# EAGLE board dc_q84 v1 (EAGLE 9.7.0), part 1 of 2
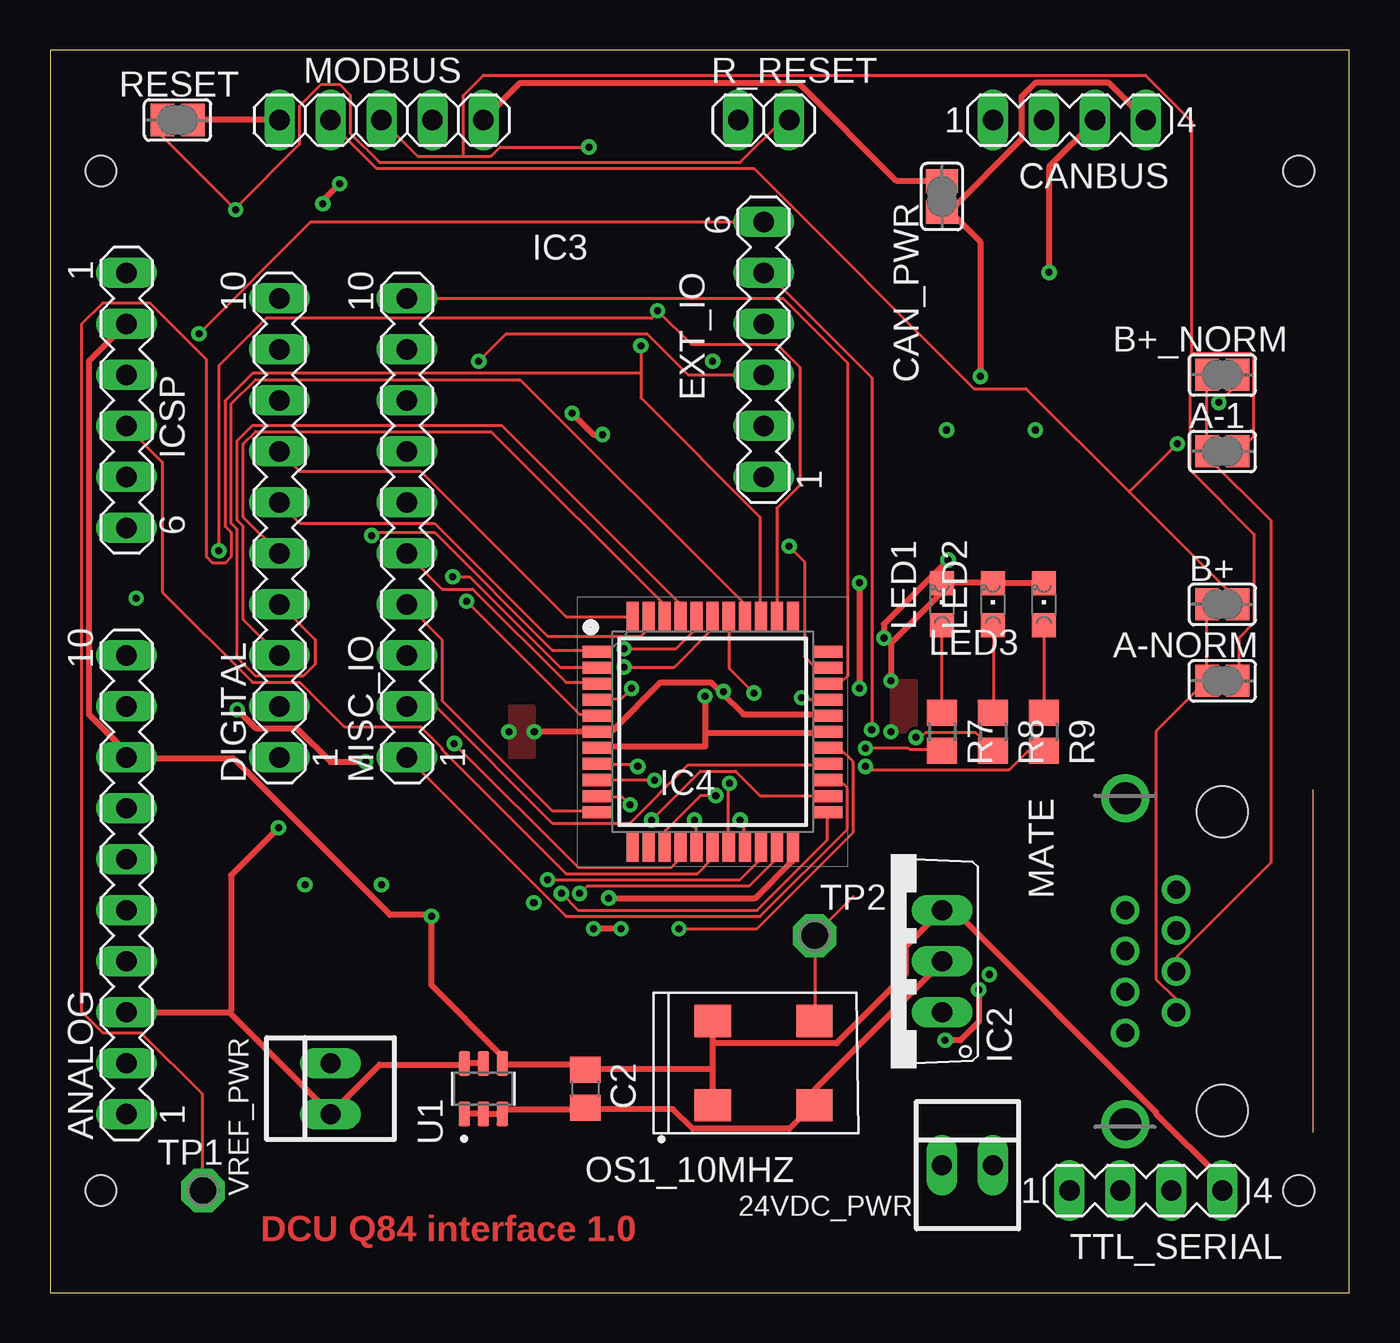
[diagram p0: board, top side]
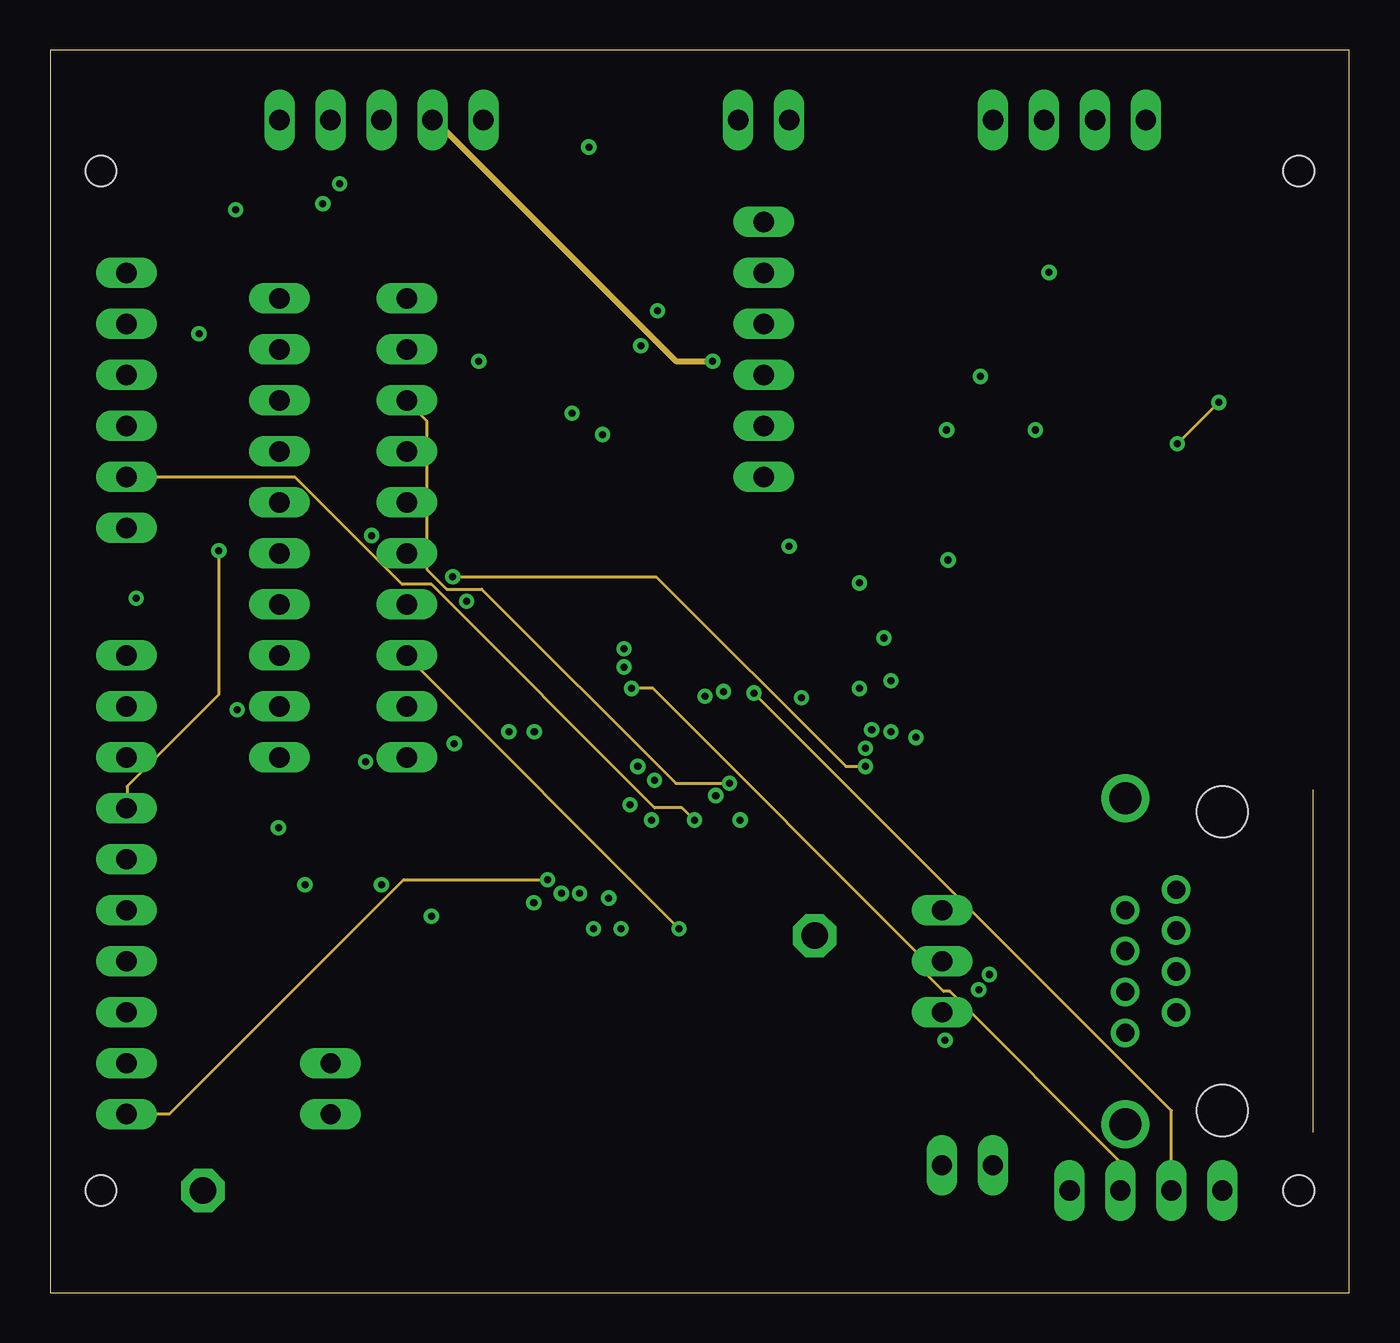
[diagram p1: board, inner layer Route2]
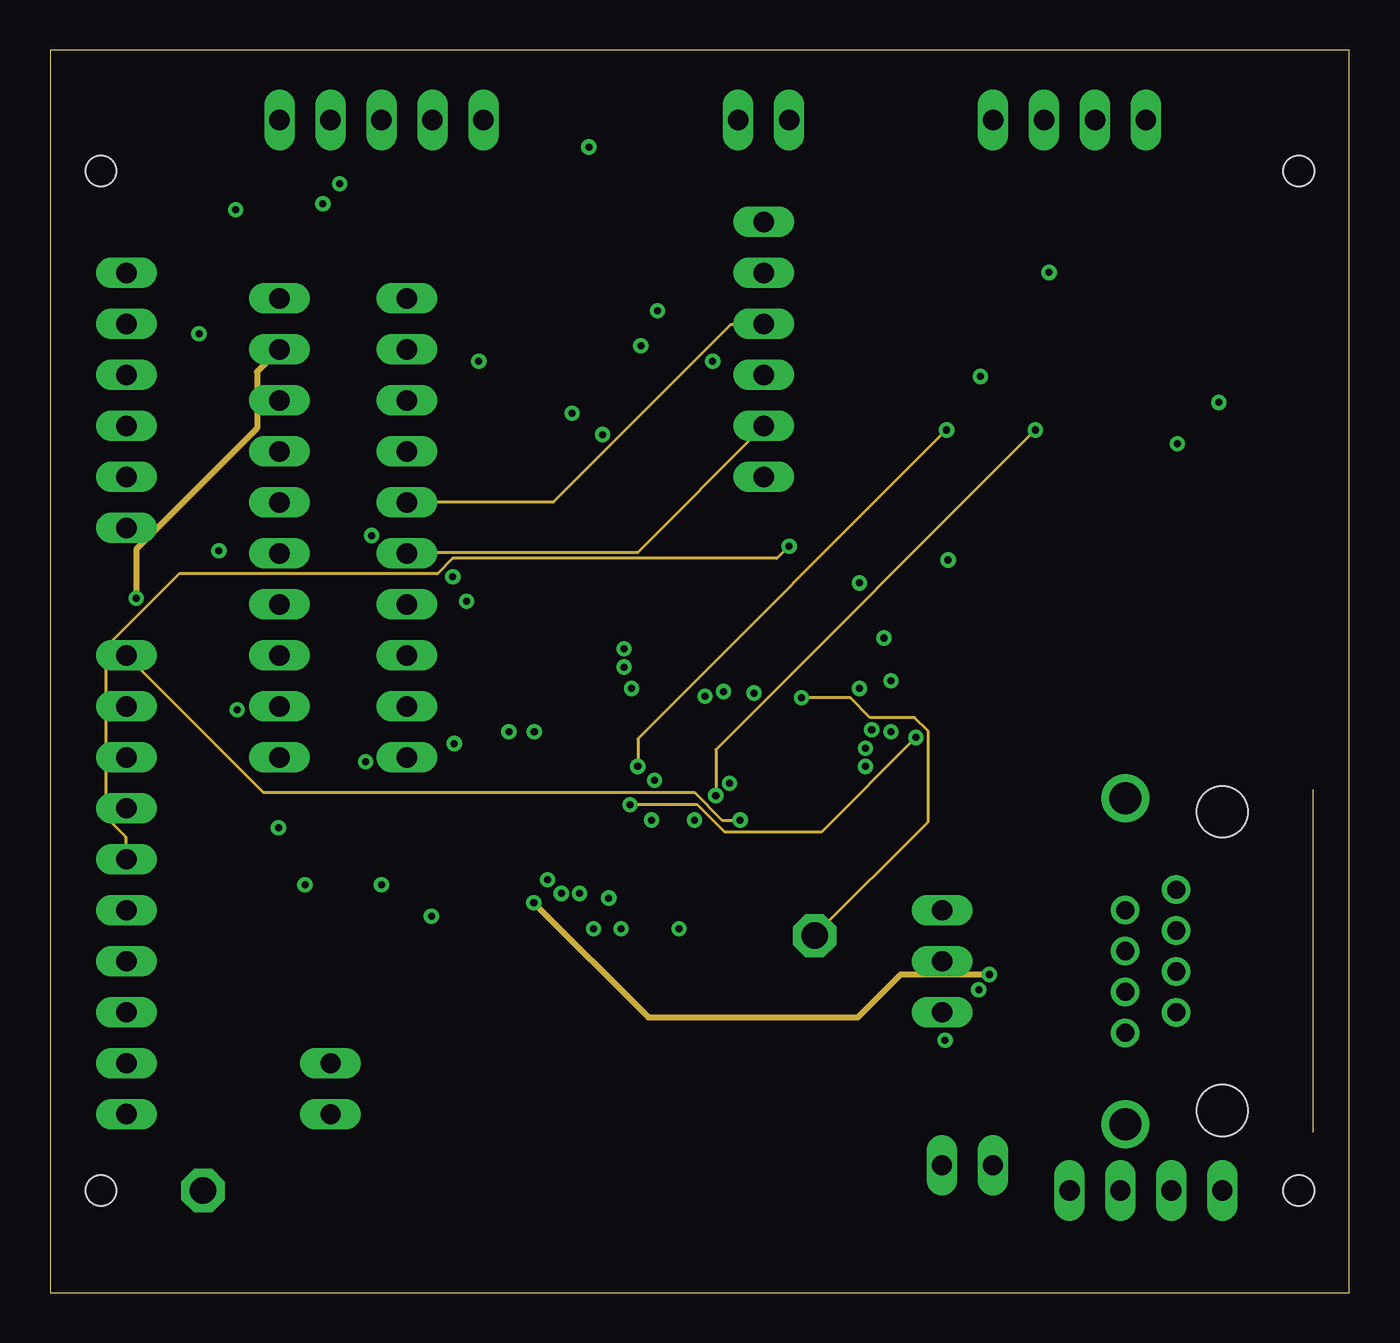
[diagram p2: board, inner layer Route15]
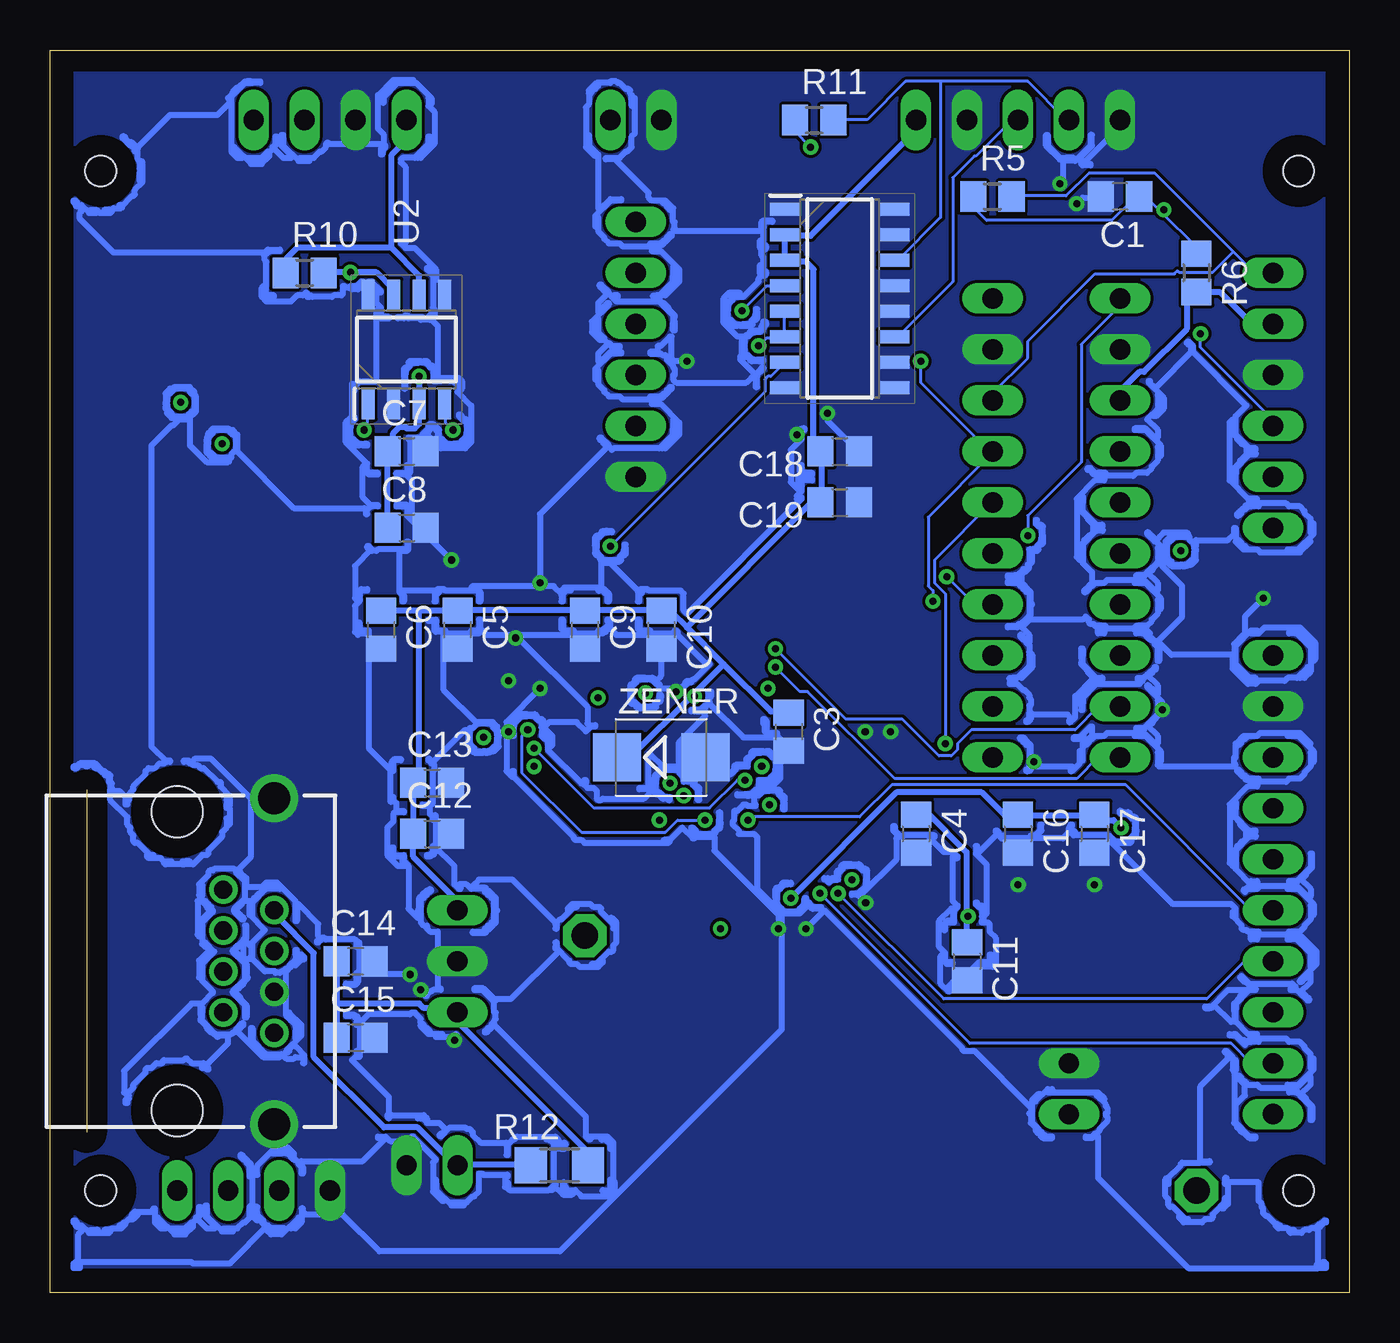
[diagram p3: board, bottom side, seen from below]

Size 64.75 x 61.9 mm. Coordinates in mm from the lower left corner, seen from the top.
Outline: 0,0 64.75,0 64.75,61.9 0,61.9 0,0
Copper layers (1+2*15+16): Top 0.035mm / dielectric 1.5mm / Route2 0.035mm / dielectric 0.15mm / Route15 0.035mm / dielectric 0.2mm / Bottom 0.035mm
Design rules "Fusion Electronics Design Rules": minimum track width 6mil, minimum drill 0.35mm, track to track 6mil, track to pad 6mil, pad to pad 6mil, via to via 6mil, smd to smd 6mil, copper to edge 40mil, drill to drill 6mil, minimum pad ring 10mil, minimum via ring 8mil, stop-mask expansion 4mil, vias tented up to drill 0mil, thermal gap 10mil
Net classes: 1 icurrent: width 0.305 mm
Holes 1.52 mm at 2.54,55.88 62.23,55.88 2.54,5.08 62.23,5.08
vRestrict: area 29.2,26.7 to 36.8,29.2

## Footprints (pad centres in the part's own frame; a part is rotated, then mirrored left to right if it is on the bottom)
22-23-2021 = drill 1 long: 1 -1.27,0; 2 1.27,0
SJ = smd 1.168 x 1.6: 1 -0.762,0; 2 0.762,0
MA10-1 = drill 1.016 long: 1 -11.43,0; 2 -8.89,0; 3 -6.35,0; 4 -3.81,0; 5 -1.27,0; 6 1.27,0; 7 3.81,0; 8 6.35,0; 9 8.89,0; 10 11.43,0
C0805 = smd 1.3 x 1.5: 1 -0.95,0; 2 0.95,0
MA04-1 = drill 1.016 long: 1 -3.81,0; 2 -1.27,0; 3 1.27,0; 4 3.81,0
MA06-1 = drill 1.016 long: 1 -6.35,0; 2 -3.81,0; 3 -1.27,0; 4 1.27,0; 5 3.81,0; 6 6.35,0
TO220V = drill 1.016 long: 1 -2.54,-2.54; 2 0,-2.54; 3 2.54,-2.54
SOIC127P600X175-16N = smd 1.525 x 0.65: 1 -2.712,4.445; 2 -2.712,3.175; 3 -2.712,1.905; 4 -2.712,0.635; 5 -2.712,-0.635; 6 -2.712,-1.905; 7 -2.712,-3.175; 8 -2.712,-4.445; 9 2.712,-4.445; 10 2.712,-3.175; 11 2.712,-1.905; 12 2.712,-0.635; 13 2.712,0.635; 14 2.712,1.905; 15 2.712,3.175; 16 2.712,4.445
QFP80P1200X1200X120-44N = smd 1.475 x 0.6: 1 -5.738,4; 2 -5.738,3.2; 3 -5.738,2.4; 4 -5.738,1.6; 5 -5.738,0.8; 6 -5.738,0; 7 -5.738,-0.8; 8 -5.738,-1.6; 9 -5.738,-2.4; 10 -5.738,-3.2; 11 -5.738,-4; 23 5.738,-4; 24 5.738,-3.2; 25 5.738,-2.4; 26 5.738,-1.6; 27 5.738,-0.8; 28 5.738,0; 29 5.738,0.8; 30 5.738,1.6; 31 5.738,2.4; 32 5.738,3.2; 33 5.738,4 | smd 0.6 x 1.475: 12 -4,-5.738; 13 -3.2,-5.738; 14 -2.4,-5.738; 15 -1.6,-5.738; 16 -0.8,-5.738; 17 0,-5.738; 18 0.8,-5.738; 19 1.6,-5.738; 20 2.4,-5.738; 21 3.2,-5.738; 22 4,-5.738; 34 4,5.738; 35 3.2,5.738; 36 2.4,5.738; 37 1.6,5.738; 38 0.8,5.738; 39 0,5.738; 40 -0.8,5.738; 41 -1.6,5.738; 42 -2.4,5.738; 43 -3.2,5.738; 44 -4,5.738
CHIPLED_0805 = smd 1.2 x 1.2: A 0,-1.05; C 0,1.05
GLX-S-88M = drill 0.9 pad 1.422: 1 -3.57,-2.3; 2 -2.55,-4.84; 3 -1.53,-2.3; 4 -0.51,-4.84; 5 0.51,-2.3; 6 1.53,-4.84; 7 2.55,-2.3; 8 3.57,-4.84 | drill 1.6 pad 2.184: S1 -8.125,-4.84; S2 8.125,-4.84 | hole 2.55: -7.44,0; 7.44,0
1X05 = drill 1.016 long: 1 -5.08,0; 2 -2.54,0; 3 0,0; 4 2.54,0; 5 5.08,0
7.2X5.2-4-PAD = smd 1.8 x 1.6: 1 -2.54,-2.1; 2 2.54,-2.1; 3 2.54,2.1; 4 -2.54,2.1
R0805 = smd 1.3 x 1.5: 1 -0.95,0; 2 0.95,0
R1206 = smd 1.6 x 1.803: 1 -1.422,0; 2 1.422,0
1X02 = drill 1.016 long: 1 -1.27,0; 2 1.27,0
P1-13 = drill 1.321 pad 2.159 octagon: TP 0,0
SOT95P280X145-6N = smd 1.21 x 0.58: 1 -1.255,0.95; 2 -1.255,0; 3 -1.255,-0.95; 4 1.255,-0.95; 5 1.255,0; 6 1.255,0.95
SOIC127P600X175-8N = smd 1.528 x 0.65: 1 -2.711,1.905; 2 -2.711,0.635; 3 -2.711,-0.635; 4 -2.711,-1.905; 5 2.711,-1.905; 6 2.711,-0.635; 7 2.711,0.635; 8 2.711,1.905
SMB = smd 2.4 x 2.4: A 2.2,0; C -2.2,0

## Placement (x,y rotation side)
24VDC_PWR  24vdc power  [22-23-2021]  45.72,6.35 0 top
A-1  A-  [SJ]  58.42,41.91 0 top
A-NORM  A-norm  [SJ]  58.42,30.48 0 top
ANALOG  Analog  [MA10-1]  3.81,20.32 90 top
B+  B+  [SJ]  58.42,34.29 0 top
B+_NORM  B+norm  [SJ]  58.42,45.72 0 top
C1  0.1uf  [C0805]  11.43,54.61 180 bottom
C2  0.1uf  [C0805]  26.67,10.16 270 top
C3  0.1uf  [C0805]  27.94,27.94 270 bottom
C4  10uf  [C0805]  21.59,22.86 270 bottom
C5  0.1uf  [C0805]  44.45,33.02 270 bottom
C6  10uf  [C0805]  48.26,33.02 270 bottom
C7  0.1uf  [C0805]  46.99,41.91 0 bottom
C8  10uf  [C0805]  46.99,38.1 0 bottom
C9  0.1uf  [C0805]  38.1,33.02 270 bottom
C10  10uf  [C0805]  34.29,33.02 270 bottom
C11  0.1uf  [C0805]  19.05,16.51 270 bottom
C12  0.1uf  [C0805]  45.72,22.86 0 bottom
C13  10uf  [C0805]  45.72,25.4 0 bottom
C14  0.1uf  [C0805]  49.53,16.51 0 bottom
C15  10uf  [C0805]  49.53,12.7 0 bottom
C16  0.1uf  [C0805]  16.51,22.86 270 bottom
C17  10uf  [C0805]  12.7,22.86 270 bottom
C18  0.1uf  [C0805]  25.4,41.91 0 bottom
C19  10uf  [C0805]  25.4,39.37 0 bottom
CAN_PWR  CAN_PWR  [SJ]  44.45,54.61 90 top
CANBUS  CANBUS  [MA04-1]  50.8,58.42 0 top
DIGITAL  Digtal  [MA10-1]  11.43,38.1 90 top
EXT_IO  EXT_IO  [MA06-1]  35.56,46.99 90 top
IC2  7805TV  [TO220V]  41.91,16.51 90 top
IC3  ADM3095EBRZ  [SOIC127P600X175-16N]  25.4,49.53 0 bottom
IC4  PIC18F47Q84-I_PT  [QFP80P1200X1200X120-44N]  33.02,27.94 0 top
ICSP  ICSP  [MA06-1]  3.81,44.45 270 top
LED1  run  [CHIPLED_0805]  44.45,34.29 0 top
LED2  error  [CHIPLED_0805]  46.99,34.29 0 top
LED3  comm  [CHIPLED_0805]  49.53,34.29 0 top
MATE  GLX-S-88M  [GLX-S-88M]  58.42,16.51 270 top
MISC_IO  misc-io  [MA10-1]  17.78,38.1 90 top
MODBUS  MODBUS  [1X05]  16.51,58.42 0 top
OS1_10MHZ  OSC-OE-CFPS-72  [7.2X5.2-4-PAD]  35.56,11.43 0 top
R5  56ohm  [R0805]  17.78,54.61 0 bottom
R6  10k  [R0805]  7.62,50.8 270 bottom
R7  1k  [R0805]  44.45,27.94 270 top
R8  1k  [R0805]  46.99,27.94 270 top
R9  1k  [R0805]  49.53,27.94 270 top
R10  120ohm  [R0805]  52.07,50.8 0 bottom
R11  120  [R0805]  26.67,58.42 0 bottom
R12  0 ohm fuse  [R1206]  39.37,6.35 180 bottom
R_RESET  remote_reset  [1X02]  35.56,58.42 0 top
RESET  reset  [SJ]  6.35,58.42 0 top
TP1  PTR1PAD1-13  [P1-13]  7.62,5.08 0 top
TP2  PTR1PAD1-13  [P1-13]  38.1,17.78 0 top
TTL_SERIAL  TTL Serial  [MA04-1]  54.61,5.08 0 top
U1  REF3440IDBVR  [SOT95P280X145-6N]  21.59,10.16 90 top
U2  TCAN330GDR  [SOIC127P600X175-8N]  46.99,46.99 90 bottom
VREF_PWR  5vdc_vref_pwr  [22-23-2021]  13.97,10.16 90 top
ZENER  5.6V  [SMB]  34.29,26.67 0 bottom

## Library data of the parts
24VDC_PWR VREF_PWR = con-molex; MF: MOLEX; MPN: 22-23-2021; OC_FARNELL: 1462926; OC_NEWARK: 25C3832
A-1 A-NORM B+ B+_NORM CAN_PWR RESET = jumper
ANALOG CANBUS DIGITAL EXT_IO ICSP MISC_IO TTL_SERIAL = con-lstb; OC_FARNELL: unknown; OC_NEWARK: unknown
C1-C19 = rcl; SPICEPREFIX: C
IC2 = linear
IC3 = ADM3095EBRZ; DESCRIPTION: Level 4 EMC Protected RS-485 Transceiver with Full +/-42 V Fault Protection; HEIGHT: 1.75mm; MANUFACTURER_NAME: Analog Devices; MANUFACTURER_PART_NUMBER: ADM3095EBRZ; MOUSER_PART_NUMBER: 584-ADM3095EBRZ; MOUSER_PRICE-STOCK: https://www.mouser.com/Search/Refine.aspx?Keyword=584-ADM3095EBRZ
IC4 = PIC18F47Q84-I_PT; DESCRIPTION: 8-bit Microcontrollers - MCU CAN-FD, 128KB Flash, 13KB RAM, 12b ADC3, UTMR, DAC, Comp, PWM, CCP, CWG, HLT, WWDT, SCAN/CRC, ZCD, PPS,Comms IDLE/DOZE/PMD, JTAG; HEIGHT: 1.2mm; MANUFACTURER_NAME: Microchip; MANUFACTURER_PART_NUMBER: PIC18F47Q84-I/PT; MOUSER_PART_NUMBER: 579-PIC18F47Q84-I/PT; MOUSER_PRICE-STOCK: https://www.mouser.co.uk/ProductDetail/Microchip-Technology/PIC18F47Q84-I-PT?qs=d0WKAl%252BL4KYthTnAmf%2FYSg%3D%3D
LED1-LED3 = led
MATE = con-kycon; OC_FARNELL: unknown; OC_NEWARK: unknown
MODBUS R_RESET = pinhead
OS1_10MHZ = IQD-Frequency-Products
R5-R12 = rcl; SPICEPREFIX: R
TP1 TP2 = testpad
U1 = REF3440IDBVR; AVAILABILITY: In Stock; DESCRIPTION: 4.1-V, low-drift, low-power, small-footprint series voltage reference; MF: Texas Instruments; MP: REF3440IDBVR; PACKAGE: SOT-23-6 Texas Instruments; PRICE: None; PURCHASE-URL: https://pricing.snapeda.com/search/part/REF3440IDBVR/?ref=eda
U2 = TCAN330GDR; DESCRIPTION: 3.3-V CAN Transceivers with CAN FD (Flexible Data Rate); HEIGHT: 1.75mm; MANUFACTURER_NAME: Texas Instruments; MANUFACTURER_PART_NUMBER: TCAN330GDR; MOUSER_PART_NUMBER: 595-TCAN330GDR; MOUSER_PRICE-STOCK: https://www.mouser.co.uk/ProductDetail/Texas-Instruments/TCAN330GDR?qs=9DwIlvx97adeWwzxdqwSPw%3D%3D
ZENER = diode

## Nets
AN0: ANALOG.10 IC4.19
AN1: ANALOG.1 IC4.20
AN2: ANALOG.2 IC4.21
AN4: ANALOG.4 IC4.23
AN5: ANALOG.5 IC4.24
CAN_N [icurrent]: CANBUS.1 R10.1 U2.6
CAN_P [icurrent]: CANBUS.3 R10.2 U2.7
CAN_VCC [icurrent]: C7.1 C8.1 CAN_PWR.1 CANBUS.4 U2.3
CANRX: IC4.8 U2.4
CANTX: IC4.14 U2.1
CLOCKO: IC4.31 MISC_IO.10
CPU_CLK: IC4.30 OS1_10MHZ.3 TP2.TP
CS: DIGITAL.3 IC4.41
DB0: DIGITAL.1 IC4.39
DB1: DIGITAL.2 IC4.40
DERE: IC3.5 IC3.6 IC4.36 TP1.TP
DLED: IC4.2 IC4.11 MISC_IO.4 R9.2
MB_A: A-1.2 A-NORM.2 IC3.11 MODBUS.3 R11.1
MB_B: B+.2 B+_NORM.2 IC3.14 MODBUS.2 R11.2
MB_RX: ANALOG.6 IC3.7 IC4.32
MB_TX: ANALOG.7 IC3.4 IC4.35
MCLR_SIG: IC4.18 ICSP.1 MISC_IO.8 R5.2
MISC: IC4.26 MISC_IO.2
MLED: IC4.9 R7.2
N$1: A-NORM.1 B+.1 MATE.7
N$2 [icurrent]: C14.1 C15.1 IC2.1 R12.1
N$3: A-1.1 B+_NORM.1 MATE.5
N$4: LED1.A R7.1
N$5: LED2.A R8.1
N$6: LED3.A R9.1
PC_RX2: IC4.38 TTL_SERIAL.3
PC_TX2: IC4.4 TTL_SERIAL.2
PGC: EXT_IO.5 IC4.16 ICSP.5
PGD: EXT_IO.6 IC4.17 ICSP.4
R_RESET: C1.1 R5.1 R6.1 R_RESET.2 RESET.1
RB5: EXT_IO.4 IC4.15 MISC_IO.6
RD5: EXT_IO.2 IC4.3 MISC_IO.5
RD7: EXT_IO.3 IC4.5 MISC_IO.7
RE2: IC4.27 MISC_IO.3
RELAY: IC4.25 MISC_IO.1
RLED: IC4.10 R8.2
SCK1: DIGITAL.4 IC4.37
SDI1: DIGITAL.5 IC4.42
SDO1: DIGITAL.6 IC4.43
UC_RX: DIGITAL.10 IC4.1
UC_TX: DIGITAL.7 IC4.44
V+ [icurrent]: 24VDC_PWR.1 MATE.2 R12.2
VDD [icurrent]: ANALOG.8 C2.1 C3.1 C4.1 C5.1 C6.1 C9.1 C10.1 C11.1 C12.1 C13.1 C18.1 C19.1 CAN_PWR.2 DIGITAL.8 IC2.3 IC3.2 IC3.3 IC4.7 IC4.28 ICSP.2 MODBUS.5 OS1_10MHZ.1 OS1_10MHZ.4 R6.2 TTL_SERIAL.4 U1.4 ZENER.C
VREF [icurrent]: ANALOG.3 C16.1 C17.1 IC4.22 U1.5 U1.6 VREF_PWR.1
VSS [icurrent]: 24VDC_PWR.2 ANALOG.9 C1.2 C2.2 C3.2 C4.2 C5.2 C6.2 C7.2 C8.2 C9.2 C10.2 C11.2 C12.2 C13.2 C14.2 C15.2 C16.2 C17.2 C18.2 C19.2 CANBUS.2 DIGITAL.9 EXT_IO.1 IC2.2 IC3.1 IC3.8 IC3.9 IC3.10 IC3.12 IC3.13 IC3.15 IC3.16 IC4.6 IC4.29 ICSP.3 LED1.C LED2.C LED3.C MATE.6 MATE.S1 MATE.S2 MISC_IO.9 MODBUS.1 MODBUS.4 OS1_10MHZ.2 R_RESET.1 RESET.2 TTL_SERIAL.1 U1.1 U1.2 U1.3 U2.2 U2.5 U2.8 VREF_PWR.2 ZENER.A

## Tracks (layer width: path | path; a pad name or v marks a point on that pad's centre or on a via)
AN0  (via drill 0.35)
  Top 0.152: v34.39,23.55 34.54,23.39 34.54,22.25 IC4.19
  Route15 0.152: v34.39,23.55 33.48,23.55 32.11,24.92 10.62,24.92 3.84,31.7 ANALOG.10
AN1  (via drill 0.35)
  Top 0.152: v24.79,20.57 34.39,20.57 35.38,21.56 35.38,22.17 IC4.20
  Route2 0.152: v24.79,20.57 17.63,20.57 5.97,8.92 3.84,8.92 ANALOG.1
AN2  (via drill 0.35)
  Top 0.152: v26.39,19.89 26.77,20.27 34.85,20.27 36.14,21.56 36.14,22.17 IC4.21
  Bottom 0.152: v26.39,19.89 18.92,12.42 5.89,12.42 4.9,11.43 ANALOG.2
AN4  (via drill 0.35)
  Top 0.152: v25.48,19.89 26.31,19.05 35.23,19.05 38.73,22.55 38.73,23.93 IC4.23
  Bottom 0.152: v25.48,19.89 20.22,14.63 7.11,14.63 5.28,16.46 3.84,16.46 ANALOG.4
AN5  (via drill 0.35)
  Top 0.152: v29.97,23.55 32.41,25.98 34.16,25.98 35.38,24.77 38.73,24.77 IC4.24
  Bottom 0.152: v29.97,23.55 29.82,23.7 24.41,23.7 22.81,25.3 11.15,25.3 4.9,19.05 ANALOG.5
CAN_N
  Bottom 0.305: 47.73,52.04 52.45,52.04 52.98,51.51 52.98,50.82 R10.1 | 47.73,52.04 46.36,50.67 U2.6 | 47.73,52.04 47.73,56.69 47.04,57.38 47.04,58.37 CANBUS.1
CAN_P  (via drill 0.35)
  Top 0.305: v49.78,50.82 49.78,56.08 52.07,58.37 CANBUS.3
  Bottom 0.305: R10.2 51.08,50.82 v49.78,50.82 48.49,50.82 47.65,49.99 47.65,49.76 U2.7
CAN_VCC  (via drill 0.35)
  Top 0.305: CANBUS.4 52.76,60.27 49.1,60.27 48.41,59.59 48.41,57.45 44.83,53.87 44.45,53.87 CAN_PWR.1 44.91,53.8 46.36,52.35 v46.36,45.64
  Bottom 0.305: C8.1 47.95,38.1 47.95,41.91 C7.1 47.8,41.99 47.65,42.14 47.65,42.82 47.35,43.13 47.04,43.13 46.97,43.05 46.58,43.05 46.36,43.28 U2.3 v46.36,45.64
CANRX  (via drill 0.35)
  Top 0.152: v29.29,26.21 29.21,26.29 27.31,26.29 IC4.8
  Route15 0.152: v29.29,26.21 29.29,27.58 v44.68,42.98
  Bottom 0.152: v44.68,42.98 45.06,43.36 45.06,44.27 U2.4
CANTX  (via drill 0.35)
  Top 0.152: v33.17,24.77 32.41,24.77 30.66,23.01 30.66,22.25 IC4.14
  Route15 0.152: v33.17,24.77 33.17,27.05 v49.1,42.98
  Bottom 0.152: v49.1,42.98 49.1,43.2 48.95,43.36 48.95,44.27 U2.1
CLOCKO
  Top 0.152: MISC_IO.10 36.53,49.53 39.73,46.33 39.73,30.71 39.42,30.4 38.81,30.4 IC4.31
CPU_CLK  (via drill 0.35)
  Top 0.152: 39.42,29.49 38.81,29.49 IC4.30 38.73,29.57 37.52,29.57 v37.44,29.64 | 40.03,19.74 38.12,17.83 TP2.TP 38.12,17.75 38.12,13.56 OS1_10MHZ.3
  Route15 0.152: v37.44,29.64 39.88,29.64 40.87,28.65 43.08,28.65 43.76,27.96 43.76,23.47 38.12,17.83 TP2.TP
CS
  Top 0.152: IC4.41 31.42,34.29 22.5,43.2 10.08,43.2 9.32,42.44 9.32,38.48 9.63,38.18 9.63,33.53 11.38,31.77 DIGITAL.3
DB0  (via drill 0.35)
  Top 0.152: IC4.39 33.02,33.07 31.12,31.17 v28.6,31.17
  Bottom 0.152: v28.6,31.17 27.38,29.95 27,29.95 22.66,25.6 13.59,25.6 12.52,26.67 DIGITAL.1
DB1  (via drill 0.35)
  Top 0.152: v28.6,32.08 31.19,32.08 32.18,33.07 32.18,33.6 IC4.40
  Bottom 0.152: v28.6,32.08 25.09,28.57 22.28,28.57 20.45,26.75 19.84,26.75 19.53,27.05 19.53,27.36 18.85,28.04 13.67,28.04 12.52,29.18 11.45,29.18 DIGITAL.2
DERE  (via drill 0.35)
  Top 0.152: v29.44,47.17 29.44,45.8 | 29.44,45.8 29.44,44.58 35.38,38.63 35.38,33.68 IC4.36 | 29.44,45.8 10.08,45.8 8.71,44.42 8.71,38.18 9.02,37.87 9.02,36.65 8.71,36.35 8.1,36.35 7.8,36.65 7.8,46.48 4.98,49.3 2.62,49.3 1.55,48.23 1.55,14.02 2.62,12.95 4.52,12.95 7.57,9.91 7.57,5.1 TP1.TP
  Bottom 0.152: v29.44,47.17 29.06,47.55 28.22,47.55 28.14,47.62 | 28.14,47.62 28.14,48.84 IC3.5 | 28.14,47.62 IC3.6
DLED  (via drill 0.35)
  Top 0.152: MISC_IO.4 19.53,32.54 19.53,29.49 25.02,24 27.23,24 IC4.11 | v20.07,35.66 20.9,35.66 25.4,31.17 27.23,31.17 IC4.2 | v40.64,26.21 40.79,26.06 47.8,26.06 48.72,26.98 49.48,26.98 R9.2
  Route2 0.152: v40.64,26.21 39.65,26.21 30.2,35.66 v20.07,35.66
  Bottom 0.152: v20.07,35.66 18.69,34.29 MISC_IO.4
MB_A  (via drill 0.35)
  Top 0.152: 56.91,46.75 56.95,46.79 59.84,46.79 60,46.63 60,42.67 59.23,41.91 A-1.2 | 56.91,46.75 56.79,46.63 56.79,41 60,37.79 60,33.38 59.23,32.61 59.23,30.48 A-NORM.2 | v26.85,57.07 22.43,57.07 21.97,56.62 20.6,56.62 | 20.6,56.62 18.31,56.62 MODBUS.3 | 20.6,56.62 20.6,59.66 21.59,60.65 54.59,60.65 56.87,58.37 56.87,46.79 56.91,46.75
  Bottom 0.152: v26.85,57.07 27.61,57.84 27.61,58.37 R11.1 | IC3.11 22.5,47.62 19.76,50.37 19.76,55.55 18.69,56.62 18.62,56.62 16.87,58.37 16.56,58.37 MODBUS.3
MB_B  (via drill 0.35)
  Top 0.152: 53.78,39.89 48.64,45.03 46.05,45.03 35.08,56.01 16.26,56.01 13.97,58.29 MODBUS.2 | 53.78,39.89 59.16,34.52 59.16,34.29 B+.2 | v58.24,44.35 59.16,45.26 59.16,45.72 B+_NORM.2 | 53.78,39.89 v56.19,42.29
  Route2 0.152: v56.19,42.29 v58.24,44.35
  Bottom 0.152: 20.37,60.35 16.03,60.35 14.12,58.45 13.97,58.45 MODBUS.2 | 20.37,60.35 22.12,60.35 24.03,58.45 25.7,58.45 R11.2 | IC3.14 22.5,51.43 20.37,53.57 20.37,60.35
MB_RX  (via drill 0.35)
  Top 0.152: v36.83,37.19 37.59,36.42 37.59,31.7 38.12,31.17 38.73,31.17 IC4.32
  Route15 0.152: v36.83,37.19 36.22,36.58 20.07,36.58 19.3,35.81 6.43,35.81 2.77,32.16 2.77,23.7 3.76,22.71 3.76,21.64 ANALOG.6
  Bottom 0.152: v36.83,37.19 29.13,44.88 29.13,45.49 28.98,45.64 28.83,45.64 28.14,46.33 IC3.7
MB_TX  (via drill 0.35)
  Top 0.152: IC4.35 36.22,39.09 37.36,40.23 37.36,46.1 36.22,47.24 31.95,47.24 v30.28,48.92 30.28,48.84 29.97,48.54 10.77,48.54 8.41,46.18 v8.41,36.96
  Route2 0.152: v8.41,36.96 8.41,29.79 3.84,25.22 3.84,24.16 ANALOG.7
  Bottom 0.152: v30.28,48.92 29.06,50.14 28.14,50.14 IC3.4
MCLR_SIG  (via drill 0.35)
  Top 0.152: v33.86,25.38 33.78,25.3 33.78,22.25 IC4.18
  Route2 0.152: v33.86,25.38 31.19,25.38 21.51,35.05 19.76,35.05 18.77,36.04 18.77,43.43 17.78,44.42 MISC_IO.8
  Bottom 0.152: 5.78,51.85 4.75,50.82 3.84,50.82 ICSP.1 | 5.78,51.85 9.7,55.78 12.98,55.78 14.12,54.63 16.79,54.63 R5.2 | 5.78,51.85 6.81,50.82 8.48,50.82 8.56,50.9 8.71,50.75 12.67,50.75 16.03,47.4 16.03,46.56 17.78,44.81 MISC_IO.8
MISC
  Top 0.152: 38.73,26.29 IC4.26 38.66,26.29 31.8,26.29 28.91,23.39 25.02,23.39 19.23,29.18 17.78,29.18 MISC_IO.2
MLED  (via drill 0.35)
  Top 0.152: v30.12,25.53 27.31,25.53 IC4.9 | v40.64,27.13 42.77,27.13 42.85,27.05 44.45,27.05 R7.2
  Bottom 0.152: v30.12,25.53 30.51,25.53 31.88,24.16 37.67,24.16 v40.64,27.13
N$1
  Top 0.152: 57.63,30.48 57.63,34.29 B+.1 | 57.63,30.48 55.12,27.96 55.12,15.62 56.11,14.63 56.11,14.02 MATE.7 | 57.63,30.48 A-NORM.1
N$2
  Bottom 0.305: 50.47,14.4 50.47,16.46 C14.1 | 50.47,14.4 50.47,12.72 C15.1 | R12.1 37.97,6.4 37.97,7.01 44.45,13.49 IC2.1 44.53,14.1 44.6,14.17 46.13,14.17 46.36,14.4 50.47,14.4
N$3
  Top 0.152: B+_NORM.1 57.63,45.72 57.63,41.91 A-1.1 57.71,41.91 57.71,41.6 60.83,38.48 60.83,21.41 56.19,16.76 56.19,16 MATE.5
N$4
  Top 0.152: R7.1 LED1.A
N$5
  Top 0.152: LED2.A 47.04,33.22 47.04,28.96 R8.1
N$6
  Top 0.152: LED3.A 49.56,33.22 49.56,28.96 R9.1
PC_RX2  (via drill 0.35)
  Top 0.152: v35.08,29.87 33.86,31.09 33.86,33.6 IC4.38
  Route2 0.152: v35.08,29.87 55.88,9.07 TTL_SERIAL.3
PC_TX2  (via drill 0.35)
  Top 0.152: v28.98,30.1 28.45,29.57 27.31,29.57 IC4.4
  Route2 0.152: v28.98,30.1 30.05,30.1 43.46,16.69 43.46,16.08 44.53,15.01 44.83,15.01 53.29,6.55 53.29,5.1 TTL_SERIAL.2
PGC  (via drill 0.35)
  Top 0.152: v32.11,23.55 32.18,23.47 32.18,22.25 IC4.16 | v40.95,28.04 40.95,45.57 35.76,50.75 35.61,50.75 EXT_IO.5
  Route2 0.152: v32.11,23.55 31.5,24.16 30.12,24.16 19,35.28 17.55,35.28 12.22,40.61 3.84,40.61 ICSP.5
  Bottom 0.152: v32.11,23.55 33.48,23.55 34.09,22.94 38.28,22.94 41.25,25.91 41.25,27.74 v40.95,28.04
PGD  (via drill 0.35)
  Top 0.152: IC4.17 33.02,21.64 32.26,20.88 25.7,20.88 19.53,27.05 19.53,27.13 18.47,28.19 14.66,28.19 12.45,30.4 10.08,30.4 5.59,34.9 5.59,41.38 3.84,43.13 ICSP.4 | EXT_IO.6 12.98,53.34 v7.42,47.78
  Bottom 0.152: v7.42,47.78 7.42,47.09 3.84,43.51 3.84,43.2 ICSP.4
R_RESET  (via drill 0.35)
  Top 0.152: RESET.1 5.59,57.61 v9.25,53.95 9.25,54.03 12.45,57.23 12.45,59.13 13.51,60.2 14.43,60.2 14.96,59.66 14.96,57.76 16.41,56.31 34.39,56.31 36.45,58.37 36.83,58.37 R_RESET.2
  Bottom 0.152: 9.36,53.84 10.08,54.56 10.47,54.56 C1.1 10.54,54.56 10.69,54.56 11.84,53.42 18.09,53.42 18.69,54.03 18.69,54.56 R5.1 | 9.36,53.84 7.65,52.12 7.65,51.82 R6.1 | 9.36,53.84 v9.25,53.95
RB5  (via drill 0.35)
  Top 0.152: v20.14,27.36 26.31,21.18 30.96,21.18 31.42,21.64 31.42,22.17 IC4.15
  Route15 0.152: EXT_IO.4 35.53,48.23 33.93,48.23 25.09,39.39 17.78,39.39 MISC_IO.6
  Bottom 0.152: v20.14,27.36 20.14,34.82 20.68,35.36 20.68,36.5 17.78,39.39 MISC_IO.6
RD5
  Top 0.152: IC4.3 27.23,30.4 25.7,30.4 21.06,35.05 19.53,35.05 17.78,36.8 MISC_IO.5
  Route15 0.152: EXT_IO.2 35.53,43.13 29.29,36.88 17.78,36.88 MISC_IO.5
RD7  (via drill 0.35)
  Top 0.152: v20.75,34.44 26.39,28.8 27.23,28.8 IC4.5 | EXT_IO.3 31.8,45.72 29.74,47.78 22.73,47.78 v21.36,46.41
  Bottom 0.152: v20.75,34.44 20.75,34.98 20.98,35.2 20.98,38.63 17.78,41.83 MISC_IO.7 17.86,41.83 21.36,45.34 v21.36,46.41
RE2  (via drill 0.35)
  Top 0.152: v31.34,18.14 35.23,18.14 40.03,22.94 40.03,26.44 39.34,27.13 38.81,27.13 IC4.27
  Route2 0.152: v31.34,18.14 17.78,31.7 MISC_IO.3
RELAY
  Top 0.152: MISC_IO.1 25.7,18.74 35.38,18.74 39.73,23.09 39.73,25.15 39.34,25.53 38.81,25.53 IC4.25
RLED  (via drill 0.35)
  Top 0.152: v28.91,24.31 28.52,24.69 27.31,24.69 IC4.10 | v43.16,27.66 43.23,27.58 43.31,27.58 43.61,27.89 46.13,27.89 46.97,27.05 R8.2
  Route15 0.152: v28.91,24.31 32.26,24.31 33.63,22.94 38.43,22.94 v43.16,27.66
SCK1
  Top 0.152: IC4.37 34.54,33.68 34.54,34.37 23.42,45.49 10.24,45.49 9.02,44.27 9.02,38.33 9.32,38.02 9.32,31.62 10.24,30.71 12.6,30.71 13.21,31.32 13.21,32.54 11.45,34.29 DIGITAL.4
SDI1
  Top 0.152: DIGITAL.5 9.63,38.63 9.63,42.29 10.24,42.9 21.97,42.9 30.58,34.29 30.58,33.68 IC4.42
SDO1
  Top 0.152: IC4.43 29.82,33.6 29.82,33.07 29.44,32.69 24.79,32.69 19.15,38.33 12.45,38.33 11.45,39.32 DIGITAL.6
UC_RX  (via drill 0.35)
  Top 0.152: v16.03,37.72 16.18,37.87 19.15,37.87 25.02,32 27.23,32 IC4.1
  Bottom 0.152: v16.03,37.72 16.03,38.71 13.36,41.38 13.36,47.24 11.45,49.15 11.45,49.53 DIGITAL.10
UC_TX
  Top 0.152: IC4.44 28.98,33.68 25.7,33.68 18.47,40.92 12.45,40.92 11.45,41.91 DIGITAL.7
V+
  Bottom 0.305: R12.2 40.79,6.4 44.45,6.4 24VDC_PWR.1 44.53,6.33 46.43,8.23 48.11,8.23 51.61,11.74 51.61,16.92 53.52,18.82 53.52,19.05 MATE.2
VDD  (via drill 0.35)
  Top 0.305: CAN_PWR.2 44.45,55.4 42.16,55.4 37.29,60.27 23.42,60.27 21.59,58.45 MODBUS.5 | IC4.7 27.31,27.2 32.64,27.2 32.64,27.89 | IC4.28 38.73,27.89 32.64,27.89 | v32.64,29.72 32.64,27.89 | ICSP.2 3.76,48.23 1.93,46.41 1.93,28.8 3.76,26.98 3.76,26.67 ANALOG.8 3.91,26.59 9.17,26.59 16.94,18.82 18.92,18.82 v19,18.74 19,15.32 22.43,11.89 22.43,11.51 U1.4 22.58,11.35 26.39,11.35 26.62,11.12 C2.1 26.77,11.12 33.02,11.12 | OS1_10MHZ.4 33.02,12.42 | 33.02,12.42 33.02,11.12 | 33.02,11.12 OS1_10MHZ.1 | TTL_SERIAL.4 58.4,5.1 58.4,5.64 55.12,8.92 55.12,8.99 45.06,19.05 IC2.3 42.62,17.22 42.62,15.85 39.19,12.42 33.02,12.42
  Bottom 0.305: MODBUS.5 21.59,57.91 26.85,52.65 27.99,52.65 IC3.2 28.14,52.65 28.14,51.43 IC3.3 27.99,51.36 27.08,51.36 26.7,50.98 26.7,42.21 26.47,41.99 C18.1 26.31,41.91 26.31,39.39 C19.1 26.47,39.32 26.85,39.32 33.02,33.15 | 46.36,33.98 48.26,33.98 C6.1 | 46.36,33.98 44.45,33.98 C5.1 44.37,33.98 38.2,33.98 C9.1 38.05,33.98 34.39,33.98 C10.1 34.24,33.91 33.78,33.91 33.02,33.15 | 33.02,33.15 31.19,31.32 | 31.19,31.32 28.83,28.96 27.99,28.96 C3.1 | ZENER.C 35.84,26.67 32.72,29.79 | 31.19,31.32 32.72,29.79 | v32.64,29.72 32.72,29.79 | ICSP.2 3.84,48.31 4.9,48.31 6.43,49.84 7.57,49.84 R6.2 7.72,49.76 8.1,49.38 8.1,48.01 10.24,45.87 10.47,45.87 11.38,44.96 11.38,44.5 DIGITAL.8 | 19.08,18.74 19.08,21.95 20.98,23.85 21.59,23.85 C4.1 | 19.08,18.74 19.08,17.53 C11.1 | v19,18.74 19.08,18.74 | IC2.3 44.45,19.51 46.66,21.72 46.66,22.78 C12.1 46.66,25.38 C13.1 46.58,25.53 46.36,25.76 46.36,33.98
VREF  (via drill 0.35)
  Top 0.305: U1.5 21.59,11.43 20.68,11.43 U1.6 20.52,11.35 16.41,11.35 13.97,8.92 VREF_PWR.1 13.89,8.99 8.94,13.94 | 8.94,13.94 3.84,13.94 ANALOG.3 | v27.84,19.66 35.15,19.66 36.98,21.49 36.98,22.17 IC4.22 | v11.38,23.16 9.02,20.8 9.02,14.02 8.94,13.94
  Bottom 0.305: v27.84,19.66 22.58,24.92 18.31,24.92 17.17,23.77 16.56,23.77 C16.1 16.41,23.77 12.75,23.77 C17.1 12.6,23.7 12.45,23.55 11.76,23.55 v11.38,23.16
VSS  (via drill 0.35)
  Top 0.305: U1.1 20.68,8.92 21.59,8.92 U1.2 21.67,8.92 22.5,8.92 U1.3 22.66,8.99 22.81,9.14 26.62,9.14 C2.2 26.77,9.14 31.04,9.14 32.03,8.15 36.83,8.15 37.97,9.3 OS1_10MHZ.2 38.12,9.37 38.12,10.13 44.45,16.46 IC2.2 | LED3.C 49.48,35.36 47.12,35.36 LED2.C 46.97,35.36 44.45,35.36 LED1.C 44.37,35.2 44.37,34.82 41.94,32.38 41.94,30.48 v41.91,30.48 | v24.13,27.94 24.18,27.96 27.23,27.96 IC4.6 27.38,28.04 28.07,28.04 30.43,30.4 32.94,30.4 33.48,29.87 | 33.48,29.87 34.54,28.8 38.73,28.8 IC4.29 | RESET.2 7.11,58.45 11.38,58.45 MODBUS.1 | v33.55,29.95 33.48,29.87 | v44.6,12.57 45.36,12.57 46.28,13.49 v46.28,15.09 | v27.53,42.75 27.08,42.75 v26.01,43.81 | v41.55,32.61 41.55,33.3 v44.76,36.5 | v15.72,26.44 13.97,26.44 12.29,28.12 10.24,28.12 v9.32,29.03 | v28.45,18.14 v27.08,18.14 | v40.34,35.36 v40.34,30.1 | v13.59,54.25 13.59,54.41 v14.43,55.24
  Route2 0.305: v33.02,46.41 31.19,46.41 19.23,58.37 19.08,58.37 MODBUS.4
  Route15 0.305: v46.81,15.85 42.39,15.85 40.26,13.72 29.82,13.72 v24.11,19.43 | v4.29,34.59 4.29,37.03 10.31,43.05 10.31,45.87 DIGITAL.9
  Bottom 0.305: v33.55,29.95 33.4,29.79 33.33,29.87 33.33,30.02 32.87,30.48 32.79,30.48 | 32.79,30.48 32.79,30.4 32.87,30.4 32.94,30.48 33.02,30.48 33.1,30.4 33.1,30.33 33.33,30.1 34.39,30.1 34.39,30.33 34.54,30.33 34.85,30.63 35,30.63 35.08,30.56 35.53,30.56 35.53,30.4 35.84,30.1 35.84,29.95 35.76,29.87 35.76,29.41 35.61,29.41 35.31,29.11 35.15,29.11 35.08,29.18 34.62,29.18 34.62,29.34 34.31,29.64 34.31,29.79 34.39,29.79 34.39,29.64 34.31,29.57 34.31,29.49 34.39,29.41 34.47,29.41 34.54,29.34 34.54,29.18 34.62,29.11 35.08,29.11 35.15,29.18 35.31,29.18 35.38,29.11 35.46,29.11 35.53,29.18 35.53,29.26 35.61,29.34 35.76,29.34 35.84,29.41 35.84,29.87 35.76,29.95 35.76,30.1 35.84,30.17 35.84,30.25 35.76,30.33 35.69,30.33 35.61,30.4 35.61,30.56 35.53,30.63 35.08,30.63 35,30.56 34.85,30.56 34.77,30.63 34.7,30.63 34.62,30.56 34.62,30.48 34.54,30.48 34.31,30.71 34.31,32 C10.2 | 39.8,5.18 39.65,5.33 39.19,4.88 38.73,4.88 38.66,4.95 38.66,5.03 39.04,5.03 39.12,5.1 39.12,5.18 39.19,5.26 39.19,5.33 39.12,5.41 39.12,5.49 39.19,5.49 39.19,5.41 39.04,5.26 39.04,5.1 38.58,5.1 38.28,4.8 36.83,4.8 36.6,5.03 36.6,5.49 36.75,5.64 36.83,5.64 36.83,5.56 36.75,5.49 36.75,5.18 36.91,5.03 37.21,5.03 37.21,5.1 36.91,5.1 36.83,5.18 36.83,5.49 36.68,5.64 36.68,7.47 36.98,7.77 37.21,7.77 37.29,7.7 37.29,7.62 37.21,7.62 37.14,7.7 37.06,7.7 36.75,7.39 36.75,7.16 36.83,7.16 36.83,7.39 37.06,7.62 37.14,7.62 37.29,7.77 37.9,7.77 37.9,7.7 37.82,7.7 37.82,7.62 37.9,7.62 38.05,7.77 38.05,8.76 42.7,13.41 42.77,13.33 42.7,13.26 42.85,13.11 42.93,13.11 42.93,13.03 43,12.95 43.08,12.95 43.08,13.03 42.93,13.18 42.85,13.18 42.62,13.41 42.62,13.56 42.55,13.64 42.55,13.94 42.62,13.94 42.62,14.48 42.55,14.55 42.62,14.63 42.7,14.63 42.7,14.71 43.16,15.16 43.61,15.16 43.61,15.09 43.23,15.09 42.7,14.55 42.62,14.55 42.55,14.63 41.78,14.63 39.42,16.99 39.57,17.14 39.5,17.22 39.5,17.45 39.57,17.45 39.57,17.22 38.89,16.53 38.89,16.46 38.81,16.38 38.51,16.38 38.35,16.23 37.44,16.23 37.21,16.46 37.21,16.53 37.29,16.53 37.29,16.46 37.44,16.31 37.52,16.31 37.59,16.38 37.74,16.38 37.74,16.31 37.59,16.31 36.91,16.99 36.75,16.99 36.68,17.07 36.68,17.3 36.53,17.45 36.53,18.44 36.75,18.67 36.83,18.67 36.83,18.59 36.75,18.59 36.6,18.44 36.6,18.36 36.68,18.29 36.68,18.14 36.6,18.14 36.6,18.29 37.29,18.97 37.29,19.13 37.36,19.2 37.67,19.2 37.82,19.35 38.73,19.35 38.96,19.13 38.96,19.05 38.89,19.05 38.89,19.13 38.73,19.28 38.66,19.28 38.58,19.2 38.51,19.2 38.51,19.28 38.58,19.28 39.27,18.59 39.34,18.59 39.57,18.36 39.57,18.14 39.5,18.14 39.5,18.36 41.71,20.57 43.38,20.57 43.69,20.27 43.69,20.19 43.08,20.19 43,20.12 43.08,20.04 43.08,19.96 43,19.96 42.93,20.04 42.7,19.81 42.77,19.74 42.77,19.66 42.7,19.66 42.62,19.74 42.55,19.66 42.55,19.13 42.47,19.05 42.55,18.97 42.55,18.44 42.62,18.36 42.7,18.44 42.77,18.44 42.77,18.36 42.7,18.29 42.93,18.06 43,18.14 43.08,18.14 43.08,18.06 43,17.98 43.08,17.91 43.69,17.91 43.69,17.98 43.08,17.98 42.93,18.14 42.93,18.29 42.77,18.29 42.62,18.44 42.62,19.66 42.77,19.81 42.93,19.81 42.93,19.96 43.08,20.12 43.76,20.12 43.99,20.34 44.37,20.34 44.45,20.27 44.37,20.19 44.3,20.19 44.3,20.12 44.37,20.12 44.6,20.34 44.6,21.26 45.59,22.25 45.67,22.25 45.67,22.17 45.59,22.1 45.59,21.87 45.67,21.79 45.75,21.87 45.9,21.72 45.97,21.72 45.97,21.79 45.9,21.79 45.82,21.72 45.67,21.87 45.67,22.1 45.52,22.25 45.52,23.77 45.59,23.77 45.59,23.55 45.67,23.55 45.67,23.7 45.82,23.85 45.82,24.23 46.2,24.23 46.2,24.31 45.75,24.31 45.67,24.38 45.67,25.98 45.59,26.06 45.59,26.29 45.82,26.52 45.82,26.59 45.9,26.59 45.9,26.52 45.75,26.36 44.07,28.04 43.92,28.04 43.92,27.66 43.84,27.58 43.84,27.43 43.92,27.36 43.84,27.28 43.84,27.13 43.61,26.9 43.16,26.9 43.08,26.98 42.93,26.98 42.85,26.9 42.77,26.98 42.62,26.98 42.39,27.2 42.39,27.66 42.47,27.74 42.47,27.89 42.39,27.96 42.47,28.04 42.47,28.19 42.7,28.42 43.46,28.42 43.54,28.35 43.54,28.27 43.69,28.12 43.84,28.12 43.84,27.66 43.92,27.58 43.92,27.43 43.61,27.13 43.61,26.98 43.16,26.98 43.08,26.9 42.93,26.9 42.62,27.2 42.47,27.2 42.47,27.66 42.39,27.74 42.39,27.89 42.7,28.19 42.7,28.35 43.46,28.35 45.14,30.02 45.14,32.84 45.06,32.92 45.06,32.99 45.14,32.99 45.21,32.92 45.52,32.92 45.59,32.99 45.59,33.38 45.67,33.45 45.9,33.45 45.9,33.53 45.52,33.53 45.52,32.99 45.21,32.99 45.06,32.84 43.38,32.84 43.31,32.92 43.38,32.99 43.46,32.92 43.76,32.92 43.76,32.99 43.46,32.99 43.31,33.15 43.31,33.53 43.38,33.53 43.38,33.15 43,32.77 38.81,32.77 38.66,32.92 38.66,32.99 38.73,32.99 38.81,32.92 39.12,32.92 39.27,33.07 39.27,33.53 39.19,33.53 39.19,33.07 39.12,32.99 38.81,32.99 38.66,32.84 37.21,32.84 37.14,32.92 37.06,32.92 36.83,33.15 36.83,33.38 36.91,33.45 36.91,33.53 36.98,33.53 36.98,33.45 36.91,33.38 36.91,33.22 37.21,32.92 37.44,32.92 37.44,32.99 37.21,32.99 36.98,33.22 36.53,32.77 35,32.77 34.85,32.92 34.85,32.99 34.92,32.99 35,32.92 35.31,32.92 35.46,33.07 35.46,33.53 35.38,33.53 35.38,33.07 35.31,32.99 35,32.99 34.85,32.84 33.55,32.84 33.55,32.92 33.63,32.92 33.63,32.99 33.55,32.99 33.48,32.92 33.48,32.77 32.03,31.32 31.95,31.39 31.88,31.32 32.64,30.56 32.72,30.56 32.79,30.48
  Bottom 0.305: 39.8,5.18 39.8,5.1 39.73,5.1 39.65,5.18 39.65,5.26 39.57,5.33 39.57,5.49 39.65,5.56 39.65,7.54 39.8,7.54 39.95,7.7 40.03,7.7 40.03,7.62 39.95,7.62 39.88,7.7 39.8,7.7 39.73,7.62 39.65,7.62 39.57,7.54 39.57,7.16 39.27,7.16 39.04,7.39 39.12,7.47 39.19,7.39 39.19,7.31 39.12,7.24 39.12,7.16 39.19,7.16 39.42,7.39 39.42,7.62 39.57,7.77 41.48,7.77 41.63,7.62 41.71,7.62 41.94,7.39 41.94,6.86 42.01,6.86 42.01,7.47 43.31,7.47 43.69,7.85 43.69,8 43.84,8.15 43.99,8.15 44.07,8.23 44.83,8.23 45.29,7.77 45.36,7.85 45.29,7.92 45.21,7.92 45.06,8.08 45.06,8.15 45.36,8.46 45.97,8.46 46.28,8.76 46.43,8.76 46.43,8.69 46.28,8.69 46.2,8.76 46.13,8.76 46.05,8.69 46.05,8.61 45.97,8.61 45.97,8.69 46.13,8.84 47.73,8.84 47.88,8.69 47.95,8.76 47.95,8.84 47.88,8.84 47.88,9.75 49.71,11.58 49.48,11.81 49.48,12.04 49.4,12.04 49.4,11.74 49.33,11.74 49.33,13.33 49.48,13.49 49.48,13.72 49.63,13.87 49.78,13.87 49.86,13.79 50.01,13.79 50.01,13.94 49.94,13.94 49.94,13.87 49.86,13.87 49.78,13.79 49.63,13.79 49.56,13.72 49.48,13.79 49.4,13.72 49.4,13.49 49.48,13.41 49.48,13.33 49.4,13.33 48.87,13.87 46.81,13.87 46.74,13.94 46.58,13.94 46.28,13.64 46.28,13.41 46.05,13.18 45.97,13.18 45.82,13.03 45.82,12.95 45.9,12.95 45.97,13.03 45.97,13.11 46.05,13.11 46.2,13.26 46.13,13.33 46.2,13.41 46.28,13.33 46.28,13.26 45.9,12.88 45.21,12.88 45.21,12.8 45.52,12.8 45.52,12.72 44.68,12.72 44.53,12.88 44.45,12.8 44.45,12.72 v44.6,12.57 | v46.28,15.09 46.28,14.86 46.13,14.86 46.05,14.78 45.97,14.78 45.97,14.86 45.82,15.01 45.75,15.01 45.67,15.09 45.29,15.09 45.29,15.16 45.44,15.16 45.44,17.98 45.82,17.98 45.97,18.14 45.97,18.29 46.13,18.29 46.28,18.44 46.28,19.66 46.13,19.81 45.97,19.81 45.97,19.96 45.82,20.12 45.75,20.04 45.82,19.96 45.9,19.96 45.97,20.04 46.2,19.81 46.13,19.74 46.13,19.66 46.2,19.66 46.28,19.74 46.36,19.66 46.36,19.13 46.43,19.05 46.36,18.97 46.36,18.67 46.43,18.67 46.89,19.13 46.89,21.26 47.19,21.56 47.12,21.64 47.12,21.79 47.57,21.79 47.65,21.87 47.65,22.17 47.73,22.17 47.73,21.87 47.57,21.72 47.19,21.72 47.19,21.64 47.12,21.56 47.19,21.49 47.19,21.41 47.12,21.34 47.04,21.34 47.04,21.26 47.42,21.26 47.95,21.79 47.95,23.16 47.65,23.47 47.65,23.85 47.57,23.93 47.12,23.93 47.12,24 47.5,24 47.5,24.38 47.65,24.54 47.65,24.69 47.73,24.69 47.73,24.46 47.8,24.46 47.8,25.98 47.65,26.14 47.65,26.44 47.57,26.52 47.27,26.52 47.27,26.59 47.57,26.59 47.73,26.44 47.73,26.14 47.65,26.06 47.65,25.98 47.73,25.98 48.87,27.13 48.87,32.84 49.02,32.99 49.33,32.99 49.33,33.38 49.4,33.38 49.4,32.99 49.33,32.92 49.02,32.92 48.95,32.99 48.87,32.99 48.87,32.92 48.95,32.84 49.33,32.84 49.4,32.77 49.56,32.92 49.56,34.21 49.33,34.44 49.33,34.9 49.25,34.98 48.95,34.98 48.95,35.05 49.25,35.05 49.4,34.9 49.4,34.52 49.48,34.52 49.56,34.59 49.56,36.2 48.72,37.03 48.87,37.19 48.95,37.19 48.95,37.11 48.87,37.03 48.79,37.03 48.72,36.96 48.49,36.96 48.41,37.03 46.97,37.03 46.97,37.41 46.89,37.41 46.89,37.03 46.97,36.96 47.35,36.96 47.35,34.9 47.19,34.75 47.19,34.44 47.12,34.44 47.12,34.75 47.27,34.9 47.27,34.98 45.59,34.98 45.44,34.82 45.36,34.9 45.36,34.98 45.44,34.98 45.44,34.9 45.52,34.82 45.52,34.44 45.59,34.44 45.59,34.9 45.44,35.05 45.14,35.05 45.06,34.98 43.46,34.98 43.38,34.9 43.38,34.44 43.31,34.44 43.31,34.9 43.46,35.05 43.76,35.05 43.76,35.13 43.69,35.2 39.65,35.2 39.19,34.75 39.19,34.44 39.27,34.44 39.27,34.75 39.04,34.98 38.81,34.98 38.81,35.05 39.04,35.05 39.19,34.9 39.27,34.98 39.12,35.13 37.44,35.13 37.29,34.98 37.14,34.98 36.98,34.82 36.98,34.44 36.91,34.44 36.91,34.82 36.98,34.9 37.06,34.82 37.14,34.9 37.06,34.98 37.14,35.05 37.29,35.05 37.36,34.98 37.44,34.98 37.44,35.05 37.29,35.2 37.29,36.35 37.14,36.5 36.37,36.5 36.37,36.65 36.07,36.96 36.07,37.03 36.14,37.11 36.14,37.26 36.07,37.26 36.07,37.11 36.14,37.03 36.14,36.96 36.07,36.88 36.07,36.8 36.14,36.73 36.22,36.73 36.3,36.65 36.3,36.5 36.37,36.42 37.14,36.42 37.29,36.58 37.29,36.65 37.59,36.96 37.59,37.11 37.52,37.19 37.52,37.64 37.36,37.64 37.06,37.95 36.98,37.95 36.91,37.87 36.75,37.87 36.75,37.95 36.91,37.95 36.98,37.87 37.06,37.87 37.14,37.95 37.21,37.95 37.29,37.87 37.29,37.79 37.36,37.72 37.52,37.72 37.59,37.64 37.59,37.19 37.52,37.11 37.52,36.96 37.59,36.88 37.59,36.8 37.52,36.73 37.44,36.73 37.36,36.65 37.36,36.58 37.29,36.5 37.29,36.42 37.21,36.35 36.83,36.35 35.31,34.82 35.23,34.9 35.23,34.98 35.31,34.98 35.31,34.9 35.38,34.82 35.38,34.44 35.46,34.44 35.46,34.9 35.31,35.05 35,35.05 34.92,34.98 33.33,34.98 33.17,34.82 33.17,33.98 33.02,33.83 27.31,39.55 27.31,39.62 27.38,39.62 27.38,39.55 27.46,39.47 27.53,39.55 27.53,39.7 27.31,39.93 27.31,40.39 27.23,40.46 26.77,40.46 26.77,40.54 27.15,40.54 27.31,40.69 27.15,40.84 26.77,40.84 26.77,40.77 27.15,40.77 27.31,40.92 27.31,41.22 27.38,41.22 27.38,40.92 27.31,40.84 27.31,40.77 27.46,40.61 27.46,40.39 27.38,40.31 27.38,40 27.46,40 27.84,40.39 27.84,41.99 27.31,42.52 27.31,42.98 27.23,43.05 27.15,43.05 27.15,42.98 27.23,42.98 27.31,43.05 27.38,42.98 27.38,42.6 27.46,42.6 27.53,42.67 v27.53,42.75
  Bottom 0.305: v26.01,43.81 26.01,43.43 24.49,41.91 C18.2 | v41.55,32.61 41.4,32.61 37.97,29.18 37.97,28.35 37.9,28.27 37.59,28.27 37.59,28.19 37.82,28.19 38.05,27.96 38.51,28.42 39.88,28.42 40.18,28.12 40.26,28.12 40.26,28.19 40.18,28.27 40.18,28.5 40.26,28.57 40.41,28.57 40.49,28.65 40.49,28.73 40.56,28.8 40.64,28.8 40.72,28.73 40.87,28.73 40.95,28.8 41.4,28.8 41.48,28.73 41.48,28.57 41.55,28.5 41.63,28.5 41.71,28.42 41.71,28.35 41.63,28.27 41.63,28.19 41.71,28.12 41.71,27.74 41.63,27.74 41.63,28.12 41.71,28.19 41.71,28.27 41.4,28.57 41.4,28.73 40.95,28.73 40.87,28.8 40.72,28.8 40.41,28.5 40.26,28.5 40.26,28.27 39.73,27.74 39.73,27.28 39.8,27.2 39.88,27.2 39.88,27.58 39.95,27.66 40.11,27.66 40.18,27.74 40.18,27.96 40.26,27.96 40.26,27.74 40.11,27.58 39.95,27.58 39.95,27.05 38.28,25.38 38.12,25.38 38.12,25.53 38.05,25.53 38.05,25.38 38.12,25.3 37.97,25.15 37.67,25.15 37.52,24.99 37.52,24.61 37.44,24.54 37.29,24.54 37.21,24.61 35.15,24.61 34.7,25.07 34.7,25.45 34.77,25.53 34.85,25.53 34.85,25.22 35,25.07 35.38,25.07 35.38,25.15 35,25.15 34.92,25.22 34.92,26.82 34.85,26.82 34.24,26.21 33.48,26.21 33.4,26.14 33.4,26.06 33.33,25.98 33.33,25.91 33.25,25.83 33.17,25.83 33.1,25.76 33.1,25.6 33.02,25.53 32.72,25.53 32.64,25.45 32.64,25.3 32.56,25.22 32.49,25.22 32.41,25.15 32.41,25.07 32.49,24.99 32.49,24.84 32.41,24.77 32.41,24.54 32.49,24.54 32.49,24.77 32.41,24.84 32.41,24.99 32.72,25.3 32.72,25.45 33.17,25.45 33.17,25.68 33.4,25.91 33.4,25.98 33.55,26.14 34.31,26.14 34.39,26.06 34.39,25.91 34.47,25.83 34.54,25.83 34.62,25.76 34.62,25.68 34.54,25.6 34.54,25.45 34.62,25.38 34.62,24.92 34.54,24.84 34.39,24.84 34.31,24.77 34.31,24.69 34.24,24.61 34.16,24.61 34.09,24.69 34.01,24.61 33.93,24.61 33.93,24.54 33.86,24.54 33.86,24.69 34.01,24.69 34.09,24.61 34.39,24.92 34.54,24.92 34.54,25.38 34.62,25.45 34.62,25.6 34.31,25.91 34.31,26.06 33.55,26.06 33.4,26.21 33.4,27.43 32.11,28.73 32.11,29.11 32.18,29.11 32.18,29.03 32.26,28.96 32.33,28.96 32.41,29.03 32.56,29.03 32.64,28.96 32.79,28.96 32.79,29.03 32.64,29.03 32.56,28.96 32.41,28.96 32.11,29.26 32.03,29.26 31.88,29.41 31.88,29.64 31.8,29.72 31.8,29.95 31.88,29.95 31.95,29.87 31.95,29.41 30.2,27.66 28.68,27.66 28.52,27.81 28.52,27.89 28.6,27.89 28.68,27.81 28.98,27.81 29.13,27.96 29.13,28.27 29.21,28.35 29.21,28.57 29.13,28.57 29.06,28.5 29.06,27.96 28.98,27.89 28.68,27.89 28.37,27.58 28.37,25.6 28.68,25.3 29.13,25.3 29.44,24.99 29.44,24.92 29.36,24.92 29.36,24.99 29.44,25.07 29.52,24.99 29.59,24.99 29.67,24.92 29.67,24.84 29.74,24.77 29.82,24.77 29.9,24.84 30.05,24.84 30.12,24.77 30.51,24.77 30.51,24.84 30.12,24.84 30.05,24.77 29.9,24.77 29.59,25.07 29.52,25.07 29.36,25.22 29.36,25.38 29.29,25.45 28.83,25.45 28.75,25.53 28.75,25.68 28.68,25.76 28.6,25.76 28.52,25.83 28.52,25.91 28.6,25.98 28.6,26.14 28.52,26.21 28.52,26.67 28.6,26.75 28.75,26.75 28.83,26.82 28.83,26.9 28.91,26.98 28.98,26.98 29.06,26.9 29.21,26.9 29.29,26.98 29.74,26.98 29.82,26.9 29.82,26.75 29.9,26.67 29.97,26.67 30.05,26.59 30.05,26.52 29.97,26.44 30.12,26.29 30.58,26.29 30.66,26.21 30.66,26.06 30.81,25.91 30.89,25.91 30.89,25.83 30.81,25.83 30.58,26.06 30.58,26.21 29.97,26.21 29.97,26.36 30.05,26.44 29.74,26.75 29.74,26.9 29.29,26.9 29.21,26.98 29.06,26.98 28.75,26.67 28.6,26.67 28.6,26.21 28.52,26.14 28.52,25.98 28.83,25.68 28.83,25.53 29.44,25.53 29.44,25.22 29.29,25.07 29.21,25.07 29.13,24.99 28.98,24.99 28.91,25.07 28.45,25.07 28.37,24.99 28.37,24.84 28.3,24.77 28.22,24.77 28.14,24.69 28.14,24.61 28.22,24.54 28.22,24.38 28.14,24.31 28.14,24.08 28.22,24.08 28.22,24.31 28.14,24.38 28.14,24.54 28.45,24.84 28.45,24.99 28.91,24.99 28.98,25.07 29.13,25.07 29.44,24.77 29.59,24.77 29.67,24.69 29.67,24.31 29.59,24.31 29.59,24.23 29.97,24.23 30.05,24.31 30.2,24.31 30.51,24 30.66,24 30.66,23.55 30.73,23.47 30.73,23.32 30.43,23.01 30.43,22.86 29.67,22.86 29.52,22.71 29.52,20.12 28.52,19.13 28.45,19.13 28.45,19.2 28.52,19.2 28.6,19.28 28.6,19.35 28.52,19.43 28.52,19.58 28.6,19.66 28.6,20.12 28.52,20.19 28.37,20.19 28.3,20.27 28.3,20.34 28.22,20.42 28.14,20.42 28.07,20.34 27.99,20.42 27.84,20.42 27.84,20.34 27.99,20.34 28.07,20.42 28.37,20.12 28.52,20.12 28.52,19.66 28.6,19.58 28.6,19.43 28.3,19.13 28.3,19.05 28.14,18.9 27.38,18.9 27,19.28 26.85,19.28 26.85,19.2 26.77,19.13 26.7,19.13 26.62,19.2 26.54,19.2 26.47,19.13 26.31,19.13 26.31,19.2 26.47,19.2 26.54,19.13 26.62,19.13 26.92,19.43 27,19.43 27.08,19.35 27.15,19.43 27.15,19.66 27.08,19.66 27.08,19.43 27.38,19.13 27.38,18.97 28.14,18.97 28.3,18.82 28.3,13.11 39.34,2.06 48.34,2.06 50.17,3.89 51.99,3.89 52.15,4.04 52.15,4.19 52.22,4.19 52.22,3.51 52.53,3.2 52.76,3.2 52.76,3.28 52.68,3.28 52.45,3.51 52.45,3.58 52.38,3.58 52.3,3.66 52.3,3.73 52.38,3.73 53.21,2.9 53.75,2.9 53.98,3.12 53.98,3.2 54.05,3.28 54.05,3.35 54.2,3.51 54.2,3.58 54.28,3.66 54.36,3.66 54.43,3.58 54.74,3.89 54.66,3.96 54.66,4.27 54.74,4.27 54.74,3.96 54.66,3.89 54.51,3.89 54.43,3.96 54.43,4.27 54.51,4.27 54.51,3.96 54.13,3.58 54.13,3.51 53.75,3.12 53.06,3.12 53.06,3.2 53.75,3.2 53.9,3.35 55.8,1.45 57.63,1.45 57.71,1.52 63.27,1.52 63.35,1.45 63.27,1.37 63.35,1.29 63.42,1.29 63.58,1.45 63.5,1.52 63.27,1.29 63.27,1.22 63.58,1.22 63.58,1.37 63.35,1.6 63.35,2.9 63.19,3.05 63.19,3.28 63.42,3.28 63.5,3.35 63.42,3.43 63.42,3.51 63.5,3.58 63.58,3.58 63.58,3.51 63.42,3.35 63.19,3.35 62.81,2.97 62.43,2.97 62.36,3.05 62.36,3.12 62.43,3.12 62.51,3.05 62.74,3.05 62.74,3.12 62.51,3.12 62.36,2.97 61.82,2.97 61.75,3.05 61.82,3.12 62.05,3.12 62.05,3.05 61.82,3.05 61.67,3.2 61.21,3.2 60.99,3.43 61.06,3.51 61.21,3.35 61.29,3.35 61.29,3.28 61.21,3.28 60.83,3.66 60.6,3.66 60.38,3.89 60.45,3.96 60.6,3.81 60.68,3.81 60.68,3.89 60.53,4.04 59.61,4.04 59.61,4.19 59.54,4.19 59.54,3.51 59.23,3.2 59,3.2 59,3.28 59.08,3.28 59.31,3.51 59.31,3.58 59.38,3.58 59.46,3.66 59.46,3.73 59.38,3.73 58.55,2.9 58.01,2.9 57.63,3.28 57.63,3.43 57.71,3.43 58.01,3.12 58.7,3.12 58.7,3.2 58.01,3.2 57.71,3.51 57.63,3.51 57.25,3.89 57.33,3.96 57.33,4.27 57.25,4.27 57.25,3.96 57.48,3.73 56.95,3.2 56.57,3.2 56.49,3.28 57.02,3.81 57.02,4.34 56.95,4.34 56.95,3.81 56.19,3.05 55.65,3.05 55.65,3.12 56.11,3.12 56.11,3.2 55.42,3.2 55.12,3.51 55.04,3.51 54.81,3.73 54.81,4.27 54.66,4.42 54.66,6.1 54.74,6.1 54.74,5.79 54.81,5.79 54.81,6.17 54.74,6.25 54.74,6.4 54.81,6.48 54.89,6.4 54.97,6.48 54.89,6.55 55.04,6.71 55.12,6.71 55.12,6.78 55.19,6.86 55.27,6.86 55.27,6.78 55.12,6.63 55.04,6.63 54.81,6.4 54.81,6.25 54.74,6.17 54.51,6.17 54.51,5.87 54.43,5.87 54.43,6.33 53.52,7.24 52.91,7.24 52.6,6.93 52.6,6.78 52.68,6.78 52.91,7.01 52.98,6.93 53.21,6.93 53.29,7.01 53.67,7.01 53.67,6.93 53.29,6.93 53.21,7.01 52.98,7.01 52.6,6.63 52.53,6.63 52.15,6.25 52.15,5.94 52.22,5.94 52.22,6.25 52.38,6.4 52.22,6.55 49.17,6.55 48.11,7.62 48.11,7.7 48.41,7.7 48.41,7.77 48.03,7.77 47.8,7.54 46.66,7.54 46.58,7.62 46.66,7.7 46.74,7.7 46.74,7.77 46.66,7.77 45.52,6.63 45.67,6.48 45.67,5.03 45.21,4.57 45.14,4.57 45.14,4.65 45.59,5.1 45.59,5.64 45.52,5.64 45.52,5.1 44.76,4.34 44.15,4.34 44.15,4.42 44.76,4.42 44.76,4.5 43.99,4.5 43.69,4.8 43.61,4.8 43.38,5.03 43.38,5.94 43.23,5.94 43.16,5.87 42.09,5.87 42.01,5.79 41.94,5.79 41.94,5.87 42.01,5.87 42.09,5.79 42.09,5.26 42.01,5.26 42.01,5.49 41.94,5.49 41.94,5.18 41.86,5.1 39.88,5.1 39.8,5.18